# Altium PCB PCB_New-Project123-copy_2026-06-21.pcbdoc
Units mm, origin at the board's own origin, x right, y up, seen from the top; angles counter-clockwise.
Board outline 101.61 x 67.65 mm, 2 copper layers (Top Layer, Bottom Layer); 6 components, 28 nets, 46 pads, 0 vias.
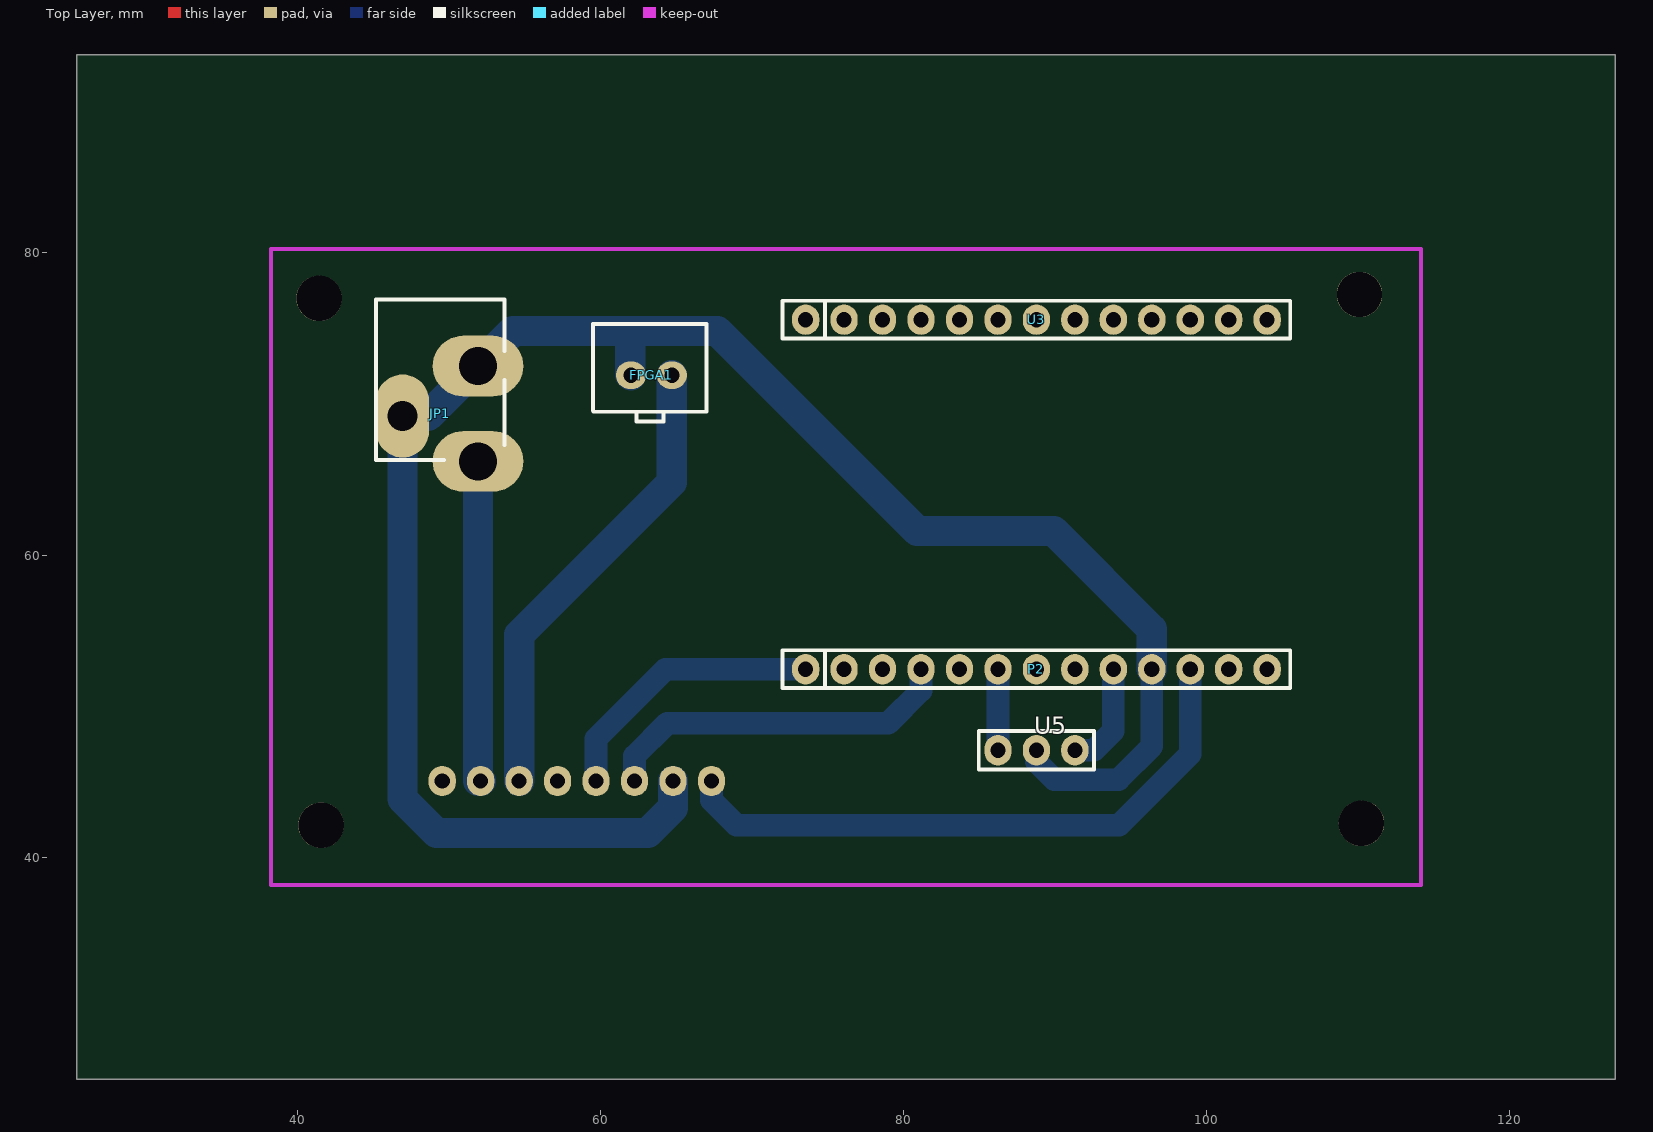
[diagram p0: Top Layer view]
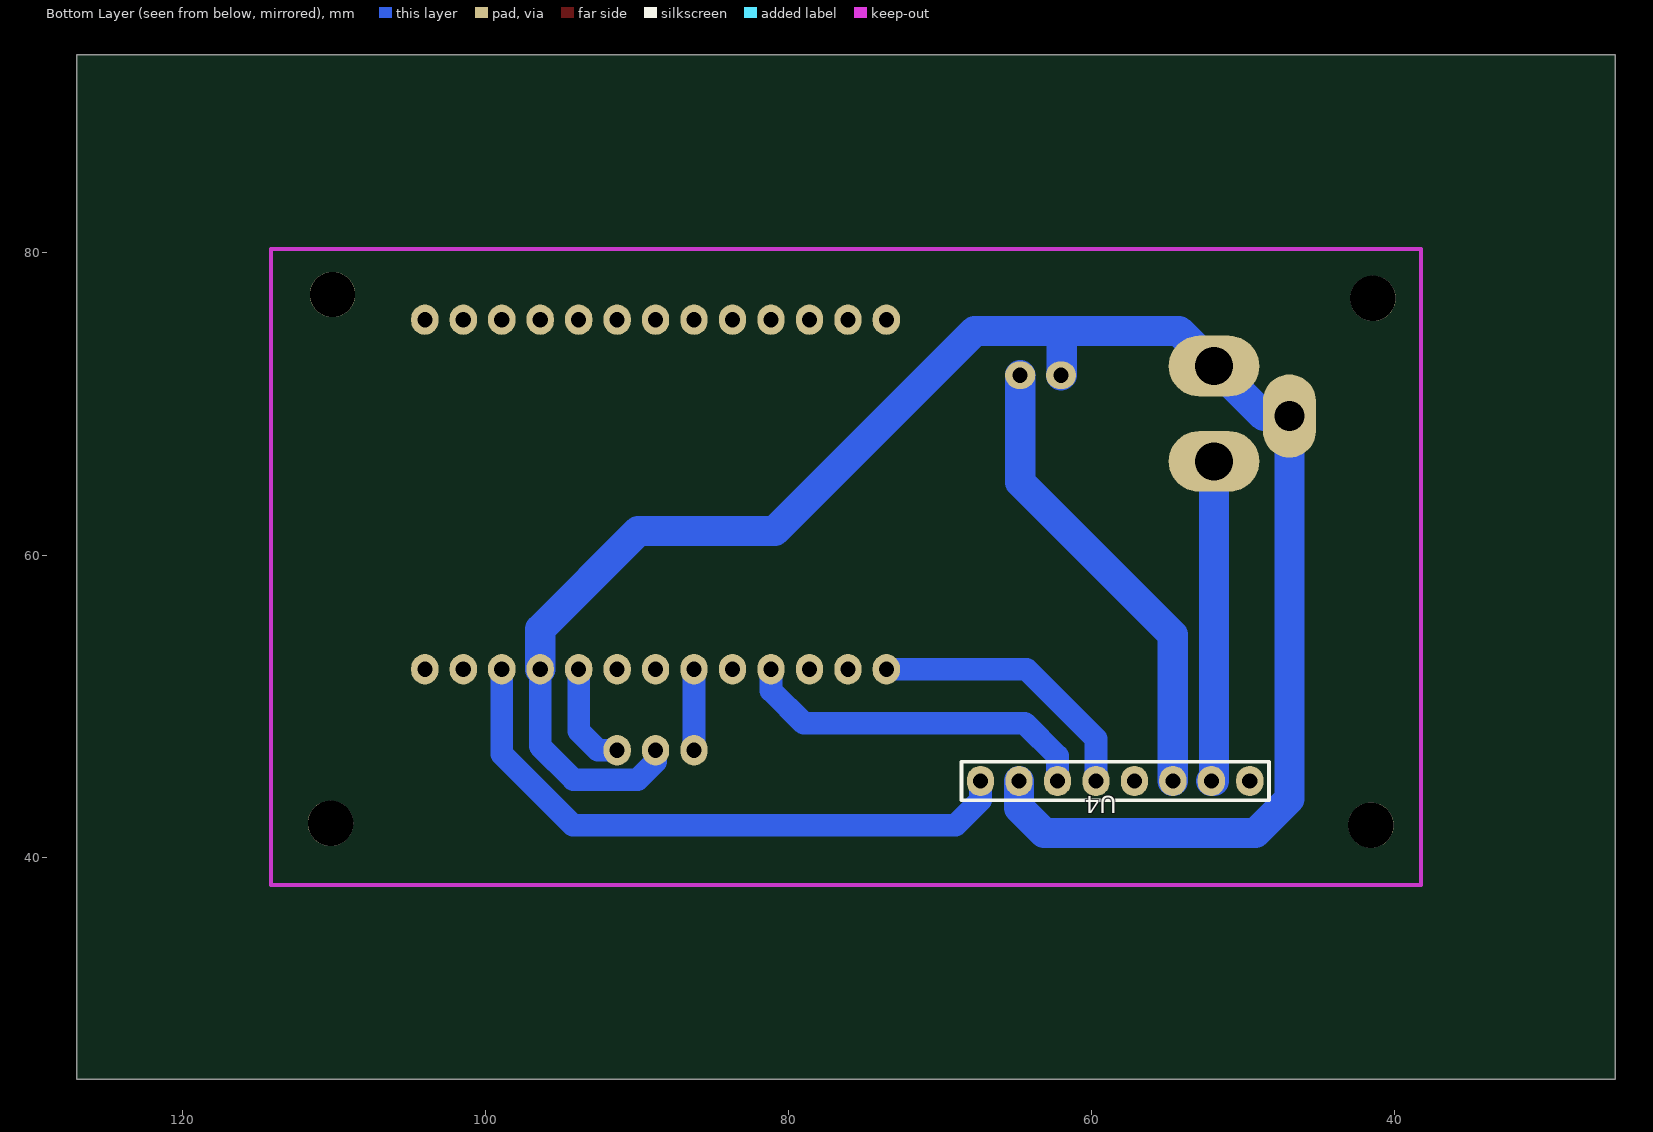
[diagram p1: Bottom Layer view, seen from below]

## Layer stack, top to bottom
Top Layer: signal copper (thickness not stored)
Dielectric: dielectric 0.32, FR-4, Dk 4.8
Bottom Layer: signal copper (thickness not stored)

## Board outline
127.005,25.4 25.4,25.4 25.4,93.048 127.005,93.048

## Components (designator, comment, footprint, x,y, rotation, side; value= is the part's Value field where it differs from the comment)
FPGA1 "2.54-2P ZZDK MS" HDR-TH_2P-P2.54_2.54-2P-ZZDK-MS 63.251,71.882 r180 top
JP1 "POWER_JACKSLT" POWER_JACK_SLOT 49.408,69.342 r180 top
P2 "Header-Female-2.54_1x13" HDR-TH_13P-P2.54-V-F 88.778,52.466 r0 top
U3 "LILY GO" HDR-TH_13P-P2.54-V-F 88.778,75.55 r0 top
U4 "HDR-TH_PM2.54-1X8PZZ-H8.5" HDR-TH_PM2.54-1X8PZZ-H8.5 58.425,45.085 r180 bottom
U5 "HDR-TH_PZ2.54-1X3PZZ-L11.5" HDR-TH_PZ2.54-1X3PZZ-L11.5 88.778,47.117 r0 top

## Footprints (in the part's own frame and the unit in brackets; to place one, negate y for a bottom-side part, rotate by r counter-clockwise, add the part's x,y. Pads: shape width x height; smd on the part's side, far side on the other; paste and mask are expansions set on the pad)
HDR-TH_2P-P2.54_2.54-2P-ZZDK-MS [mm]
  oval 2x1.8 hole 1 paste+0 mask+0.051: 1(-1.45,0) 2(1.25,0)
  silkscreen extent -3.74,-3.39 3.76,3.05
HDR-TH_13P-P2.54-V-F [mm]
  oval 1.8x2 hole 1 paste+0 mask+0.051: 1(-15.24,0) 2(-12.7,0) 3(-10.16,0) 4(-7.62,0) 5(-5.08,0) 6(-2.54,0) 7(0,0) 8(2.54,0) 9(5.08,0) 10(7.62,0) 11(10.16,0) 12(12.7,0) 13(15.24,0)
  silkscreen extent -16.76,-1.25 16.76,1.25
HDR-TH_PM2.54-1X8PZZ-H8.5 [mm]
  oval 1.8x2 hole 1 paste+0 mask+0.051: 1(8.89,0) 2(6.35,0) 3(3.81,0) 4(1.27,0) 5(-1.27,0) 6(-3.81,0) 7(-6.35,0) 8(-8.89,0)
  silkscreen extent -10.16,-1.27 10.16,1.27
HDR-TH_PZ2.54-1X3PZZ-L11.5 [mm]
  oval 1.8x2 hole 1 paste+0 mask+0.05: 1(-2.54,0) 2(0,0) 3(2.54,0)
  silkscreen extent -3.81,-1.27 3.81,1.27
POWER_JACK_SLOT [mm]
  oval 6x4 hole 2.5 paste+0 mask+0.051: GND@1(-2.489,-3.15) PWR(-2.489,3.15)
  oval 3.5x5.5 hole 2 paste+0 mask+0.051: GND@2(2.489,0.152)
  silkscreen extent -4.24,-7.54 4.24,3.05

## Free pads (board coordinates)
  round 3 hole 3 unplated paste+0: ""(41.407,76.962) ""(41.534,42.164) ""(110.114,77.216) ""(110.241,42.291)

## Nets (pads, with @x,y where several pads share a name; then routed paths per layer and width w, separated by ;. In a path a pad name is that pad's centre, name@x,y a point inside that pad or via, vN(x,y) a via of type N, cw(c..) or ccw(c..) an arc to the next point about the centre after c; other vN are vias at no path point)
3_3: P2.11 U4.8 | length 41.1
  Bottom Layer w1.5: U4.8 67.315,43.815 68.966,42.164 94.239,42.164 98.938,46.863 P2.11
FPGA1_1: FPGA1.1 U4.3 | length 31
  Bottom Layer w2: U4.3 54.615,54.737 64.701,64.823 FPGA1.1
GND: FPGA1.2 JP1.GND@1 JP1.GND@2 P2.10 U4.7 U5.2 | length 128.4
  Bottom Layer w1.5: 46.919,69.19 47.731,69.19 ; 51.897,71.895 51.897,72.492 ; U5.2 88.778,46.355 89.954,45.176 94.204,45.176 96.398,47.371 P2.10
  Bottom Layer w2: 61.961,74.803 61.961,71.922 FPGA1.2 ; U4.7 64.775,43.307 63.124,41.656 49.154,41.656 46.919,43.891 46.919,69.19 48.595,69.19 51.897,72.492 54.209,74.803 67.696,74.803 80.904,61.595 89.921,61.595 96.398,55.118 P2.10
P2_2: P2.2
P2_3: P2.3
P2_5: P2.5
P2_6: P2.6 U5.1 | length 5.3
  Bottom Layer w1.5: U5.1 P2.6
P2_7: P2.7
P2_8: P2.8
P2_9: P2.9 U5.3 | length 7.1
  Bottom Layer w1.5: U5.3 92.588,47.117 93.858,48.387 P2.9
P2_12: P2.12
P2_13: P2.13
SCL: P2.4 U4.6 | length 23.8
  Bottom Layer w1.5: U4.6 62.235,46.736 64.394,48.895 78.999,48.895 81.158,51.054 P2.4
SDA: P2.1 U4.5 | length 18.5
  Bottom Layer w1.5: U4.5 59.695,47.879 64.282,52.466 P2.1
U2_1: JP1.PWR U4.2 | length 21.3
  Bottom Layer w2: JP1.PWR 51.897,45.085 U4.2
U3_1: U3.1
U3_2: U3.2
U3_3: U3.3
U3_4: U3.4
U3_5: U3.5
U3_6: U3.6
U3_7: U3.7
U3_8: U3.8
U3_9: U3.9
U3_10: U3.10
U3_11: U3.11
U3_12: U3.12
U3_13: U3.13
pads on no net: U4.1 U4.4